# Altium PCB UPCNSL-ABS-PVC-BOT.PcbDoc
Units mm, origin at the board's own origin, x right, y up, seen from the top; angles counter-clockwise.
Board outline 98.4 x 98.4 mm, 2 copper layers (Top Layer, Bottom Layer), stack 0.325 mm thick; 67 components, 65 nets, 176 pads, 58 vias.
Unrouted connection lines stored in the file: 14.
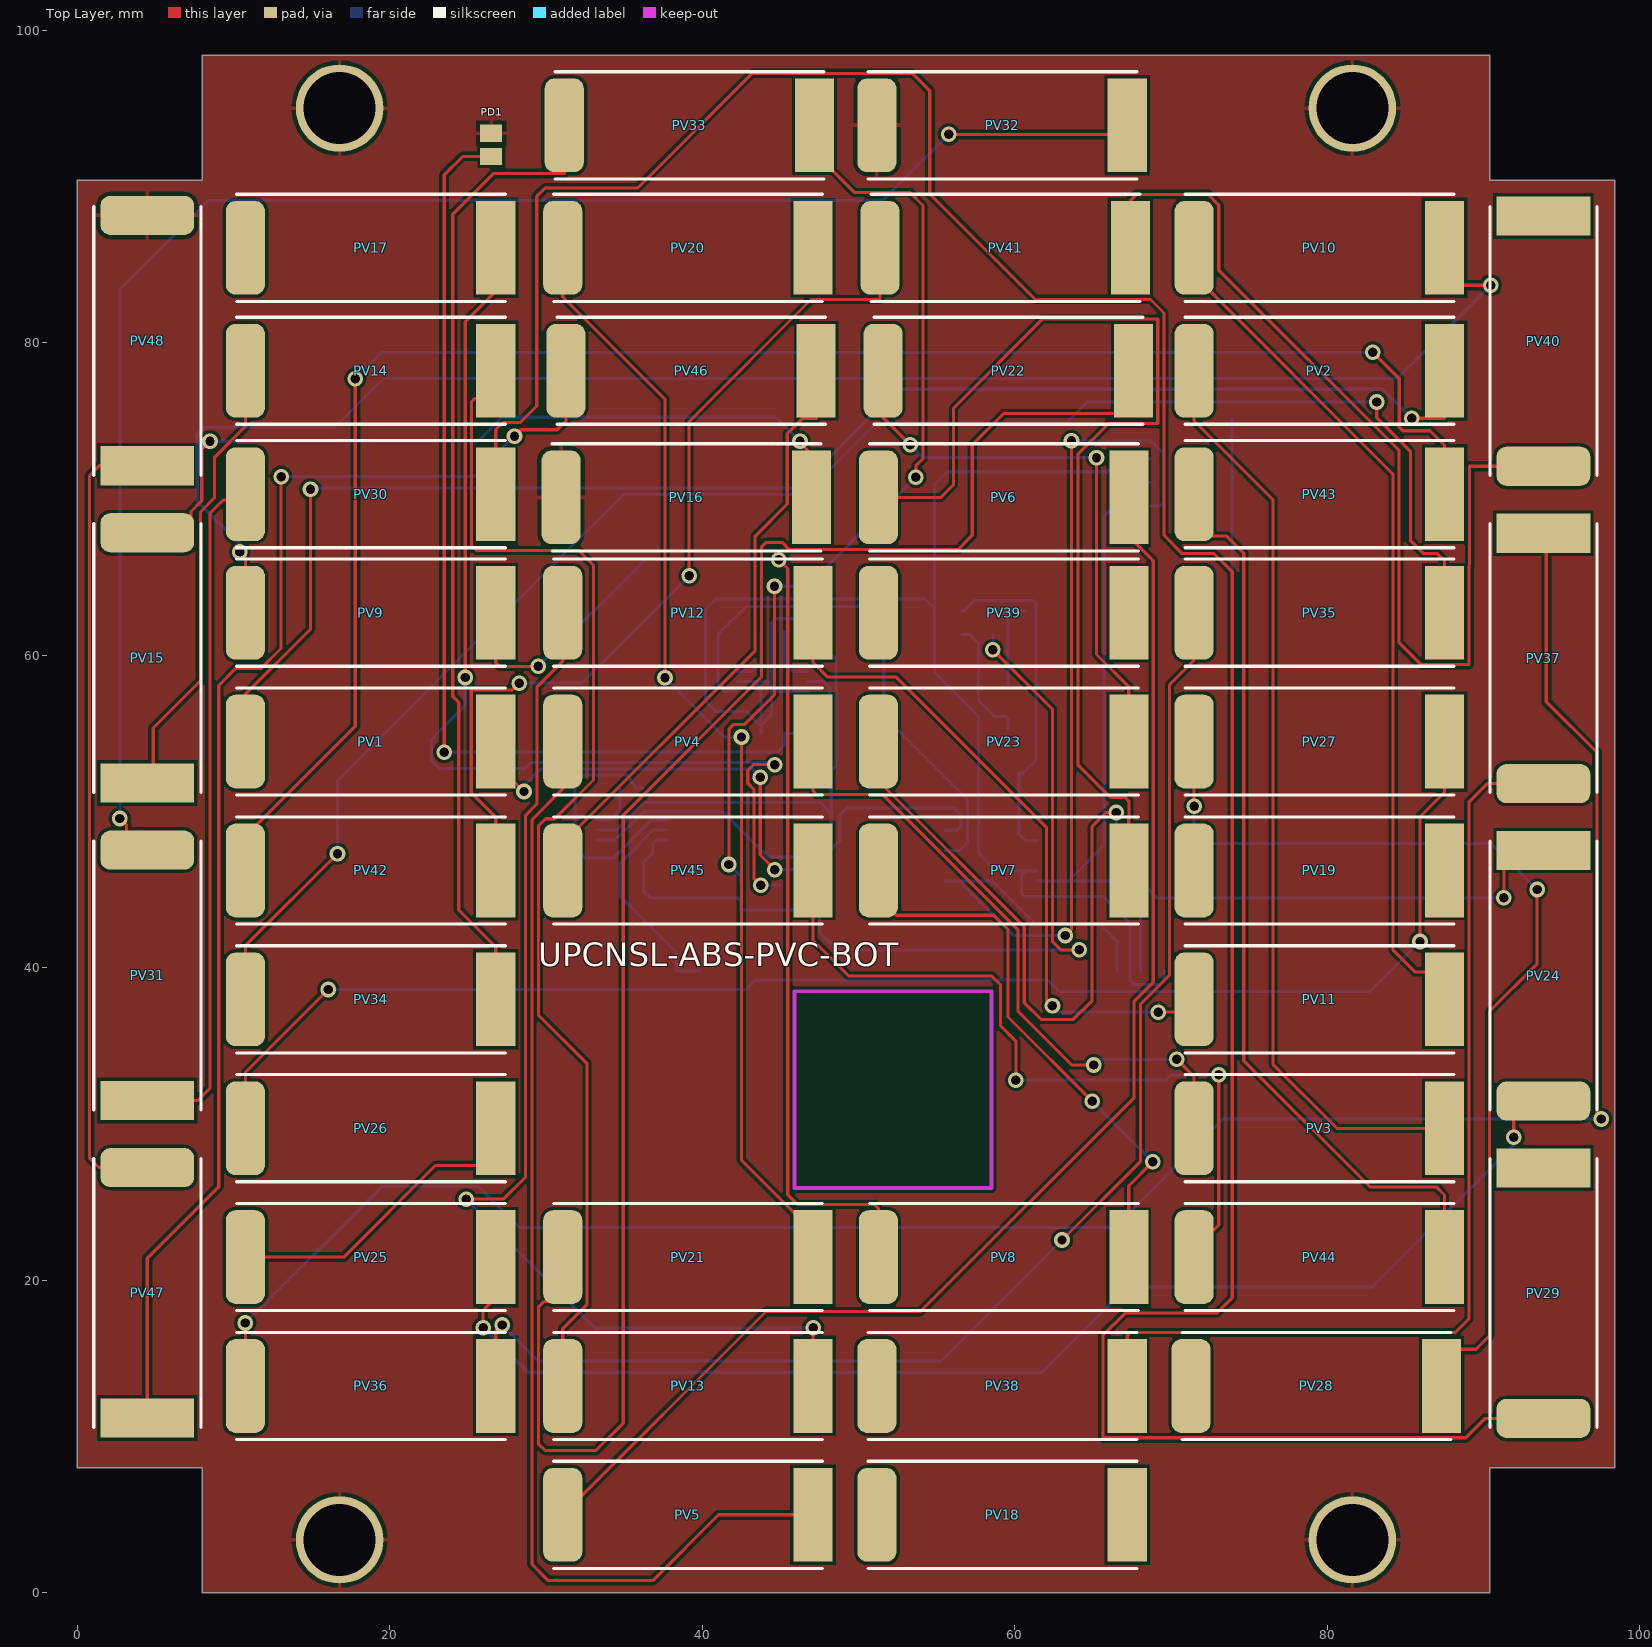
[diagram p0: Top Layer view]
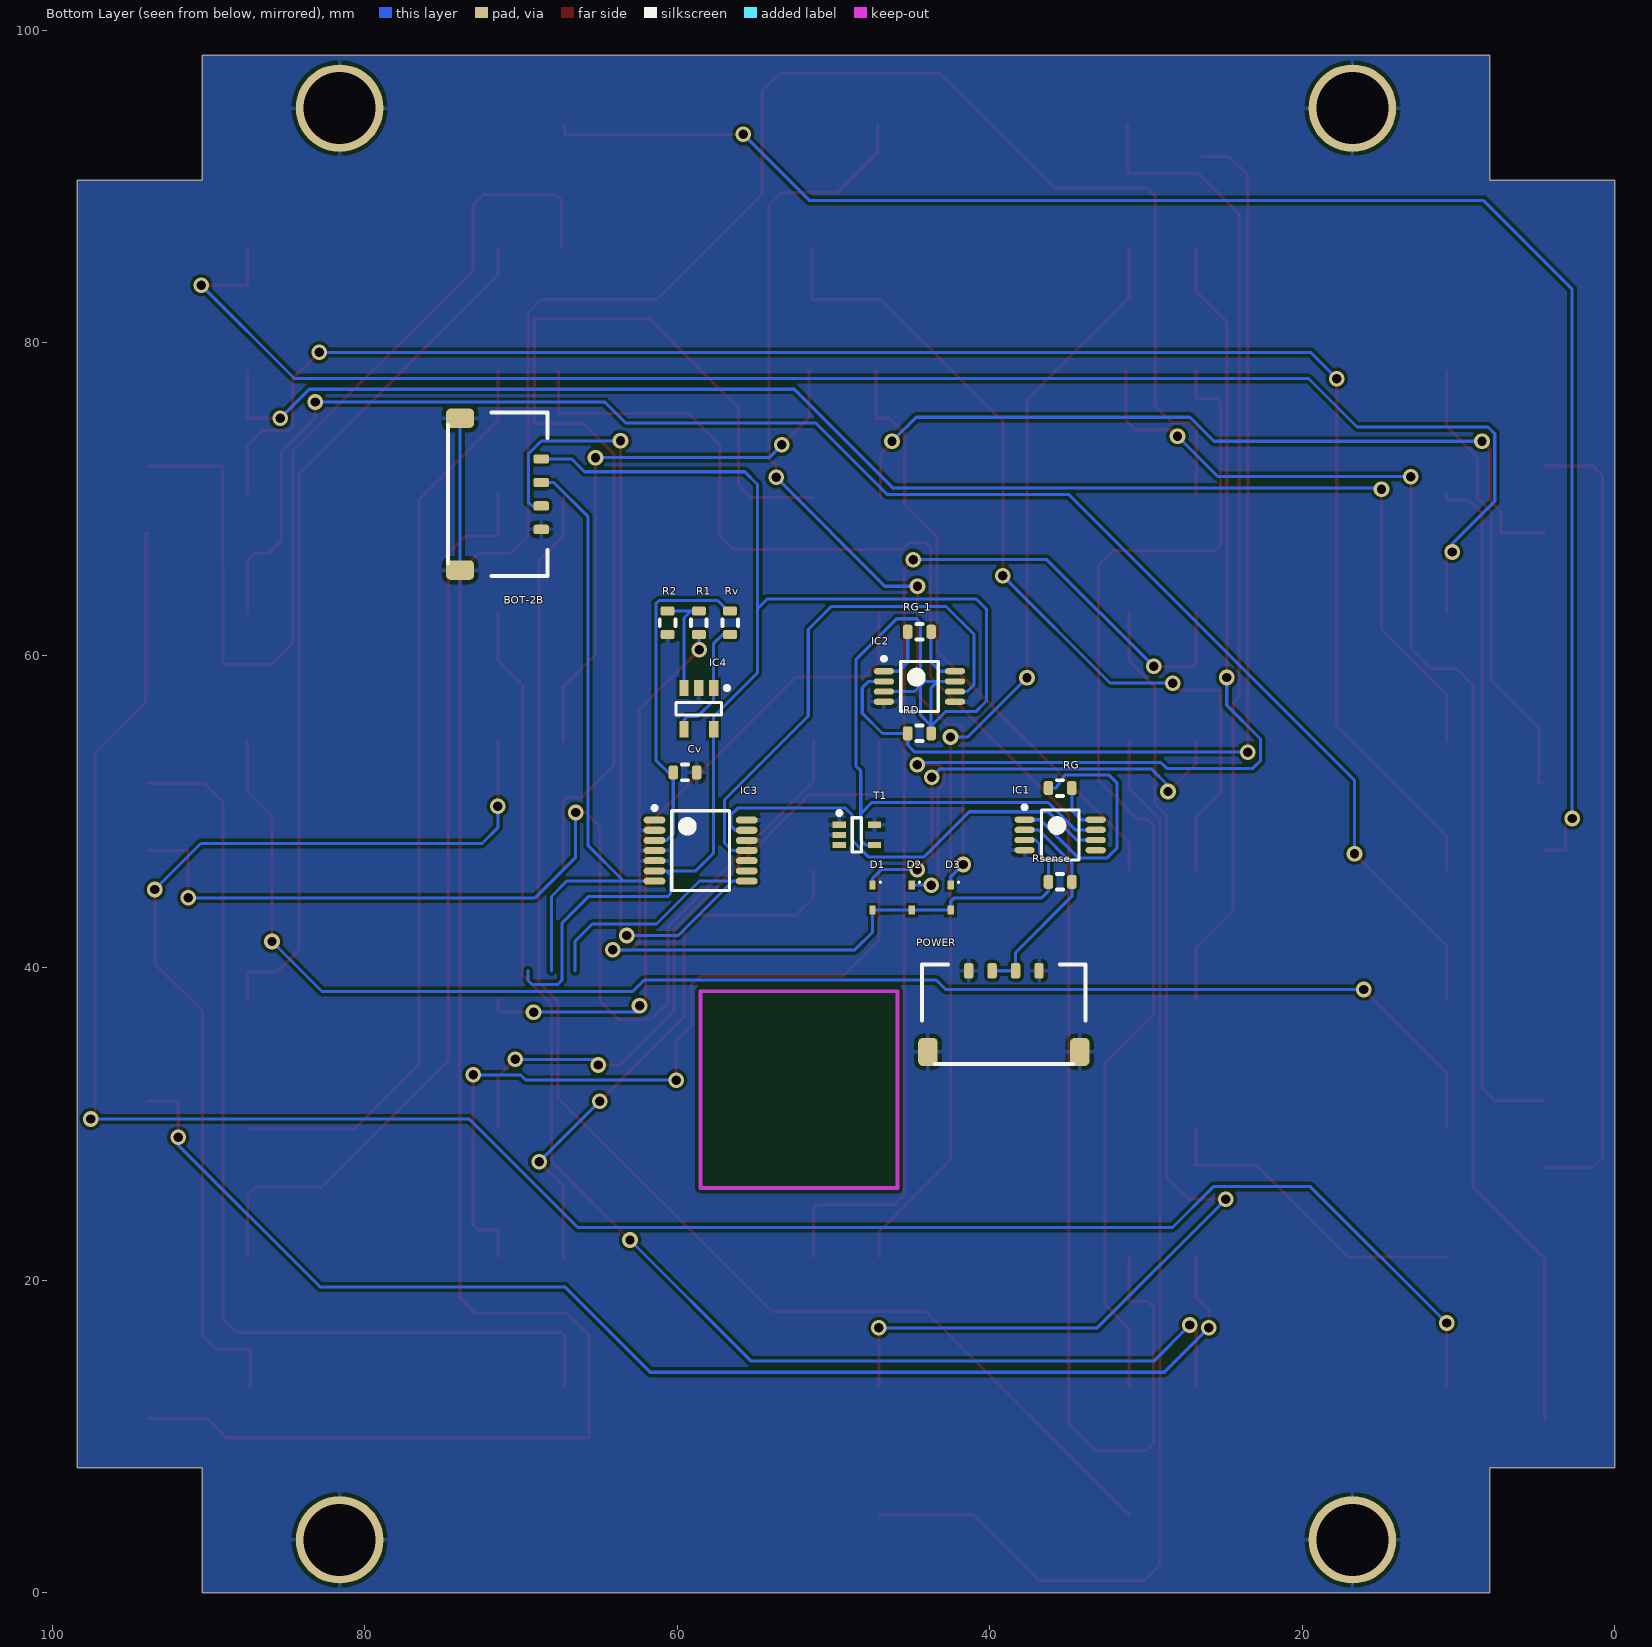
[diagram p1: Bottom Layer view, seen from below]
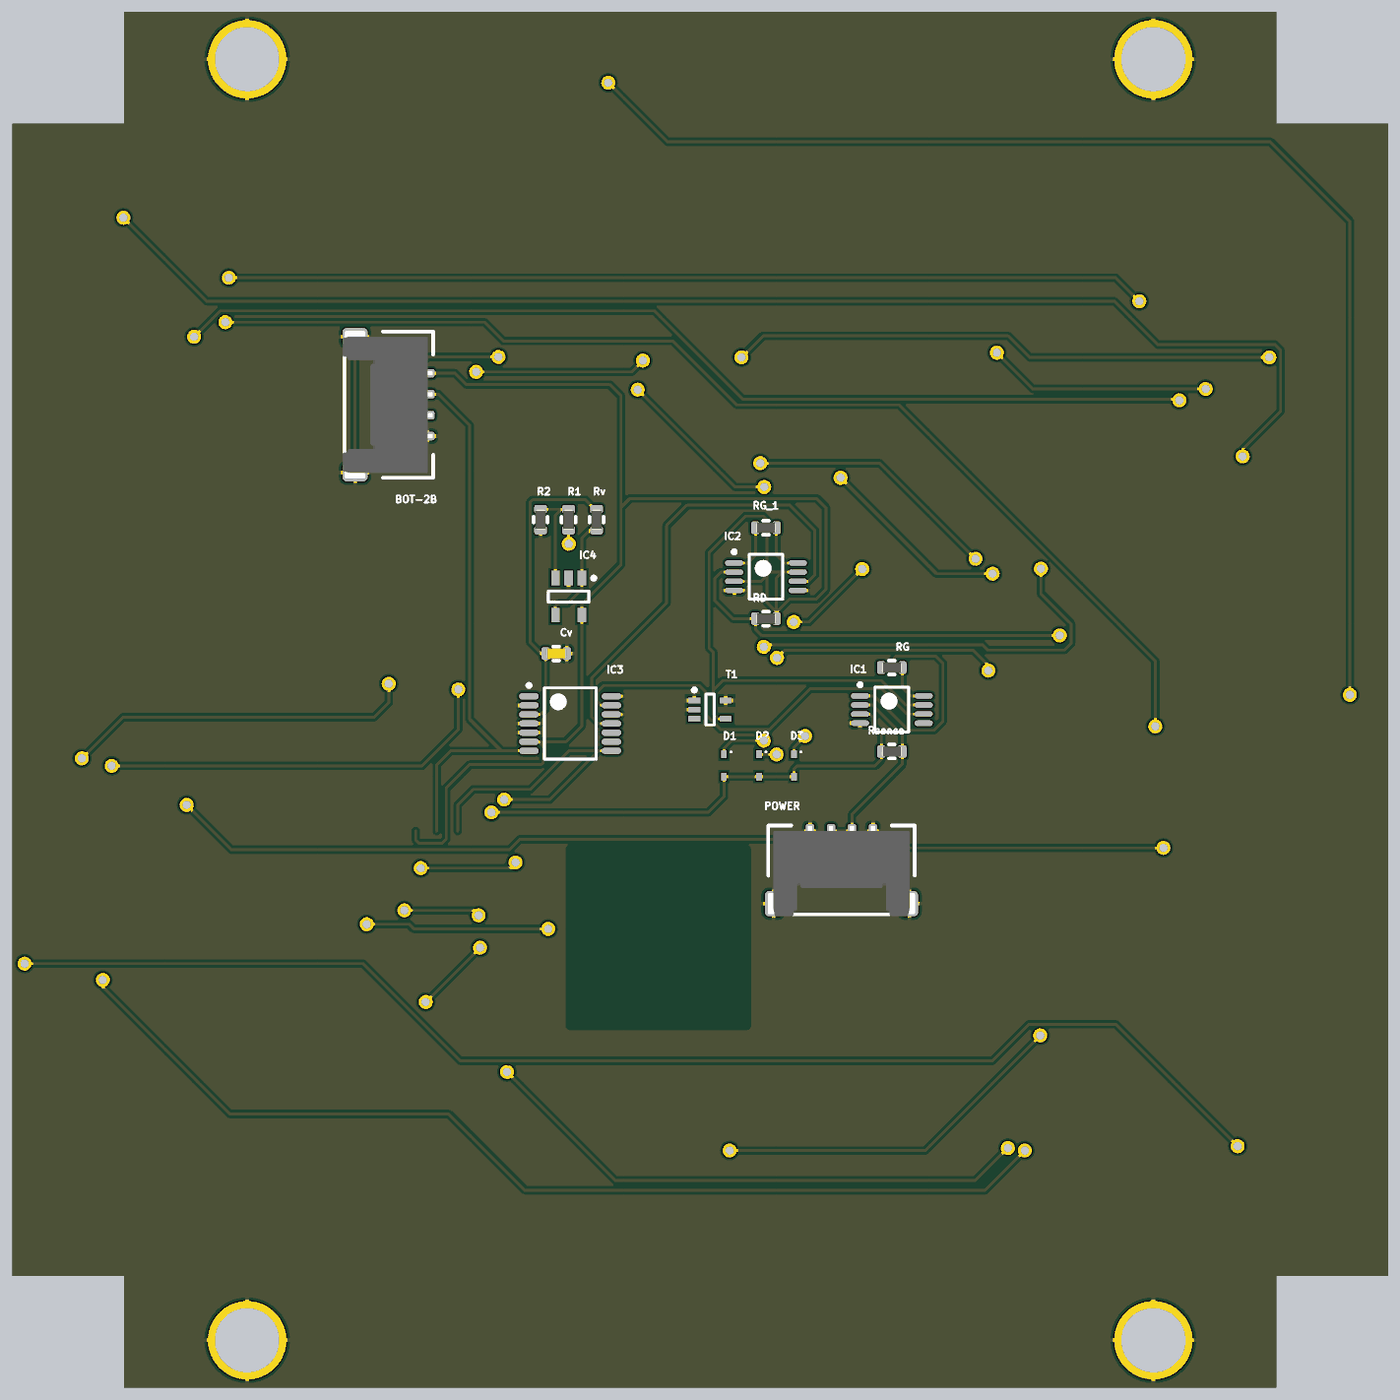
[diagram p2: 3D render of the assembled board from below, using the file's embedded part models]

## Layer stack, top to bottom
Top Solder: solder mask 0.0102, Solder Resist, Dk 3.5
Top Layer: signal copper 0.0356
Dielectric 1: core 0.254, FR-4, Dk 4.2
Bottom Layer: signal copper 0.0356
Bottom Solder: solder mask 0.0102, Solder Resist, Dk 3.5

## Board outline
16,0 82.4,0 90.4,0 90.4,8 98.4,8 98.4,16 98.4,82.4 98.4,90.4 90.4,90.4 90.4,98.4 82.4,98.4 16,98.4 8,98.4 8,90.4 0,90.4 0,82.4 0,16 0,8 8,8 8,0

## Design rules (kind name [scope] priority, off if disabled: settings)
Clearance [All] p1: gap=0.2
PolygonConnect [All] p1: connectstyle=Relief reliefconductorwidth=0.256 reliefentries=4 polygonreliefangle="90 Angle" airgapwidth=0.256
RoutingVias [All] p1: holewidth=0.6 width=1 viastyle="Through Hole" minholewidth=0.711 minwidth=1.27 maxholewidth=0.711 maxwidth=1.27
SolderMaskExpansion [All] p1: expansion=0.102
UnpouredPolygon [All] p1: allowunpoured=FALSE
Width [All] p1: maxlimit=1 minlimit=0.2 preferedwidth=0.2
29 further rules are at their usual default settings.

## Components (designator, comment, footprint, x,y, rotation, side; value= is the part's Value field where it differs from the comment)
BOT-2B "5040500491" 5040500491 73.888,70.3 r270 bottom
Cv "CAP0603" CAP0603 59.5,52.5 r0 bottom
D1 "DIODE" "(Schottky diode) SODFL160X70-2N" 47.5,44.5 r270 bottom
D2 "DIODE" "(Schottky diode) SODFL160X70-2N" 45,44.5 r270 bottom
D3 "DIODE" "(Schottky diode) SODFL160X70-2N" 42.5,44.5 r270 bottom
IC1 "AD623ARMZ" AD623ARMZ 35.5,48.5 r180 bottom
IC2 "AD623ARMZ" AD623ARMZ 44.5,58 r180 bottom
IC3 "MCP3424" MCP3424 58.5,47.5 r180 bottom
IC4 "AD8603" AD8603 58.616,56.577 r270 bottom
PD1 "Photo Sen" C0805 26.493,92.65 r270 top
POWER "5040500491" 5040500491 39.1,34.619 r180 bottom
PV1 "PVCELL" "PV CELLS" 18.8,54.473 r180 top
PV2 "PVCELL" "PV CELLS" 79.5,78.2 r180 top
PV3 "PVCELL" "PV CELLS" 79.5,29.736 r180 top
PV4 "PVCELL" "PV CELLS" 39.1,54.473 r180 top
PV5 "PVCELL" "PV CELLS" 39.1,5 r180 top
PV6 "PVCELL" "PV CELLS" 59.3,70.1 r180 top
PV7 "PVCELL" "PV CELLS" 59.3,46.227 r180 top
PV8 "PVCELL" "PV CELLS" 59.3,21.491 r180 top
PV9 "PVCELL" "PV CELLS" 18.8,62.718 r180 top
PV10 "PVCELL" "PV CELLS" 79.5,86.064 r180 top
PV11 "PVCELL" "PV CELLS" 79.5,37.982 r180 top
PV12 "PVCELL" "PV CELLS" 39.1,62.718 r180 top
PV13 "PVCELL" "PV CELLS" 39.1,13.245 r180 top
PV14 "PVCELL" "PV CELLS" 18.8,78.2 r180 top
PV15 "PVCELL" "PV CELLS" 4.5,59.808 r90 top
PV16 "PVCELL" "PV CELLS" 39,70.1 r180 top
PV17 "PVCELL" "PV CELLS" 18.8,86.064 r180 top
PV18 "PVCELL" "PV CELLS" 59.2,5 r180 top
PV19 "PVCELL" "PV CELLS" 79.5,46.227 r180 top
PV20 "PVCELL" "PV CELLS" 39.1,86.064 r180 top
PV21 "PVCELL" "PV CELLS" 39.1,21.491 r180 top
PV22 "PVCELL" "PV CELLS" 59.6,78.2 r180 top
PV23 "PVCELL" "PV CELLS" 59.3,54.473 r180 top
PV24 "PVCELL" "PV CELLS" 93.818,39.502 r270 top
PV25 "PVCELL" "PV CELLS" 18.8,21.491 r180 top
PV26 "PVCELL" "PV CELLS" 18.8,29.736 r180 top
PV27 "PVCELL" "PV CELLS" 79.5,54.473 r180 top
PV28 "PVCELL" "PV CELLS" 79.3,13.245 r180 top
PV29 "PVCELL" "PV CELLS" 93.818,19.195 r270 top
PV30 "PVCELL" "PV CELLS" 18.8,70.3 r180 top
PV31 "PVCELL" "PV CELLS" 4.5,39.502 r90 top
PV32 "PVCELL" "PV CELLS" 59.2,93.9 r180 top
PV33 "PVCELL" "PV CELLS" 39.2,93.9 r180 top
PV34 "PVCELL" "PV CELLS" 18.8,37.982 r180 top
PV35 "PVCELL" "PV CELLS" 79.5,62.718 r180 top
PV36 "PVCELL" "PV CELLS" 18.8,13.245 r180 top
PV37 "PVCELL" "PV CELLS" 93.818,59.808 r270 top
PV38 "PVCELL" "PV CELLS" 59.2,13.245 r180 top
PV39 "PVCELL" "PV CELLS" 59.3,62.718 r180 top
PV40 "PVCELL" "PV CELLS" 93.818,80.114 r270 top
PV41 "PVCELL" "PV CELLS" 59.4,86.064 r180 top
PV42 "PVCELL" "PV CELLS" 18.8,46.227 r180 top
PV43 "PVCELL" "PV CELLS" 79.5,70.3 r180 top
PV44 "PVCELL" "PV CELLS" 79.5,21.491 r180 top
PV45 "PVCELL" "PV CELLS" 39.1,46.227 r180 top
PV46 "PVCELL" "PV CELLS" 39.3,78.2 r180 top
PV47 "PVCELL" "PV CELLS" 4.5,19.195 r90 top
PV48 "PVCELL" "PV CELLS" 4.5,80.114 r90 top
R1 "RES0603" RES0603 58.616,62.077 r270 bottom
R2 "RES0603" RES0603 60.616,62.077 r90 bottom
RD "RES0603" RES0603 44.5,55 r180 bottom
RG "RES0603" RES0603 35.5,51.5 r180 bottom
RG_1 "RES0603" RES0603 44.5,61.5 r180 bottom
Rsense "RES0603" RES0603 35.5,45.5 r0 bottom
Rv "RES0603" RES0603 56.616,62.077 r90 bottom
T1 "LMT84 DCK" DCK/SOT65P210X110-5N 48.5,48.5 r180 bottom

## Footprints (in the part's own frame and the unit in brackets; to place one, negate y for a bottom-side part, rotate by r counter-clockwise, add the part's x,y. Pads: shape width x height; smd on the part's side, far side on the other; paste and mask are expansions set on the pad)
5040500491 [mm] "1.50mm Pitch Pico-Lock™ Surface Mount Wire-to-Board Header, Right Angle,2.00mm Mated Height, Positive Side Locks, 4 Circuits"
  rrect50% 1.25x1.8 smd: 0(-4.855,0) 0(4.855,0)
  rrect50% 0.6x1 smd: 1(-2.25,5.19) 2(-0.75,5.19) 3(0.75,5.19) 4(2.25,5.19)
  silkscreen extent -5.23,-0.76 5.23,5.59, body extent -5.27,-0.9 5.28,5.54, height 1.98
"(Schottky diode) SODFL160X70-2N" [mm] "SODFL, 2-Leads, Body 0,80x1,60mm, IPC Medium Density"
  rect 0.55x0.4 smd: A(-0.8,0) K(0.8,0)
  silkscreen extent -1.02,0.45 -0.93,0.55, body extent -0.65,-0.45 0.65,0.45, height 0.7
AD623ARMZ [mm] "Single-Supply, Rail-to-Rail, Instrumentation Amplifier"
  oval 1.3x0.4 smd: 1(-2.275,0.975) 2(-2.275,0.325) 3(-2.275,-0.325) 4(-2.275,-0.975) 5(2.275,-0.975) 6(2.275,-0.325) 7(2.275,0.325) 8(2.275,0.975)
  silkscreen extent -2.4,-1.6 1.2,1.9, body extent -1.6,-1.6 1.6,1.6, height 1.1
AD8603 [mm] "SOT23, 5-Leads, Body 2,90x2,80mm, Pitch 0,95mm, IPC Medium Density"
  rect 1.05x0.6 smd: 1(-1.325,0.95) 2(-1.325,0) 3(-1.325,-0.95) 4(1.325,-0.95) 5(1.325,0.95)
  silkscreen extent -1.45,-1.45 0.4,1.92, body extent -0.8,-1.45 0.8,1.45, height 1
C0805 [mm] "Chip Capacitor, Body 2.0x1.3mm, IPC High Density"
  rect 1.1x1.4 smd: 1(-0.75,0) 2(0.75,0)
  body extent -1.1,-0.72 1.1,0.72, height 1.4
CAP0603 [mm] "Capacitor Chip Inductor, Body 0.6x0.3mm, IPC High Density"
  rrect50% 0.6x0.9 smd: 1(-0.75,0) 2(0.75,0)
  silkscreen extent -0.2,-0.5 0.2,0.5, body extent -0.76,-0.38 0.76,0.38, height 0.76
DCK/SOT65P210X110-5N [mm] "SOT23, 5-Leads, Body 2,00x2,10mm, Pitch 0,65mm, IPC Medium Density"
  rect 0.85x0.4 smd: 1(-1.125,0.65) 2(-1.125,0) 3(-1.125,-0.65) 4(1.125,-0.65) 5(1.125,0.65)
  silkscreen extent -1.25,-1.1 0.3,1.52, body extent -0.7,-1.07 0.7,1.08, height 1.1
MCP3424 [mm] "18-Bit, Multi-Channel ?S Analog-to-Digital Converter with  I2C"
  oval 1.4x0.45 smd: 1(-2.95,1.95) 2(-2.95,1.3) 3(-2.95,0.65) 4(-2.95,0) 5(-2.95,-0.65) 6(-2.95,-1.3) 7(-2.95,-1.95) 8(2.95,-1.95) 9(2.95,-1.3) 10(2.95,-0.65) 11(2.95,0) 12(2.95,0.65) 13(2.95,1.3) 14(2.95,1.95)
  silkscreen extent -3.08,-2.55 1.85,2.85, body extent -2.25,-2.55 2.25,2.55, height 1.2
"PV CELLS" [mm] "IXYS KXOB22-12X1L-ND"
  rect 2.5x6 smd: 1(-7.993,0)
  rrect50% 2.5x6 smd: 2(8.025,0)
  silkscreen extent -8.6,-3.43 8.6,3.43, body extent -8.97,-3.5 9.03,3.5, height 1.8
RES0603 [mm] "Resistor Chip Inductor, Body 0.6x0.3mm, IPC High Density"
  rrect50% 0.6x0.9 smd: 1(-0.75,0) 2(0.75,0)
  silkscreen extent -0.2,-0.5 0.2,0.5, body extent -0.76,-0.38 0.76,0.38, height 0.76

## Part data
BOT-2B POWER: library part MOLEX_5040500491, "1.50mm Pitch Pico-Lock™ Surface Mount Wire-to-Board Header, Right Angle,2.00mm Mated Height, Positive Side Locks, 4 Circuits"
Cv: "Capacitor"
IC3: "18-Bit, Multi-Channel ?S Analog-to-Digital Converter with  I2C"
PD1: "Photosensitive Diode"
PV1 PV2 PV3 PV4 PV5 PV6 PV7 PV8 PV9 PV10 PV11 PV12 PV13 PV14 PV15 PV16 PV17 PV18 PV19 PV20 PV21 PV22 PV23 PV24 PV25 PV26 PV27 PV28 PV29 PV30 PV31 PV32 PV33 PV34 PV35 PV36 PV37 PV38 PV39 PV40 PV41 PV42 PV43 PV44 PV45 PV46 PV47 PV48: library part PVCELLS, "IXYS KXOB22-12X1L-ND"
R1 R2 RD RG RG_1 Rsense Rv: "Resistor"

## Free pads (board coordinates)
  round 5.6 hole 4.6: 0(16.8,95) 1(81.6,95) 2(81.6,3.4) 3(16.8,3.4)

## Via types
v1: diameter 1, hole 0.6, Top Layer to Bottom Layer, 58 vias

## Nets (pads, with @x,y where several pads share a name; then routed paths per layer and width w, separated by ;. In a path a pad name is that pad's centre, name@x,y a point inside that pad or via, vN(x,y) a via of type N, cw(c..) or ccw(c..) an arc to the next point about the centre after c; other vN are vias at no path point)
5V: BOT-2B.1 IC1.7 IC2.3 IC2.7 IC3.6 IC4.5 RD.2 T1.4 | length 134
  Bottom Layer w0.2: IC1.7 34.522,48.825 36.268,50.571 47.549,50.571 48.26,49.86 ; IC2.7 43.337,58.325 ; RD.2 43.75,55.474 ; IC2.3 44.821,57.675 44.425,58.071 ; T1.4 47.93,47.85 48.26,48.18 48.26,49.86 ; IC3.6 60.703,46.2 ; BOT-2B.1 66.74,72.55 65.927,71.737 55.677,71.737 54.864,70.924 54.864,62.967 ; 69.543,39.809 69.543,39.186 69.291,38.934 67.648,38.934 67.365,39.218 67.365,42.871 65.665,44.571 60.585,44.571 60.427,44.729 60.427,45.923 60.703,46.2 ; 43.337,58.325 43.75,57.912 43.75,55.474 ; 43.337,58.325 44.171,58.325 44.425,58.071 ; 43.75,55.474 42.836,56.388 40.894,56.388 40.208,57.074 40.208,62.941 40.858,63.591 54.239,63.591 54.864,62.967 ; 43.75,55.474 44.425,56.148 44.425,58.071 ; 44.425,58.071 44.425,62.052 44.704,62.332 45.949,62.332 48.565,59.715 48.565,52.908 48.26,52.603 48.26,49.86 ; 54.864,62.967 54.864,58.877 57.666,56.076 IC4.5 57.666,47.346 58.811,46.2 60.703,46.2
GND: BOT-2B.0 BOT-2B.4 Cv.1 IC1.4 IC1.5 IC2.4 IC2.5 IC3.2 IC3.4 IC3.5 IC3.12 IC3.14 IC4.2 pad.0 pad.1 pad.2 pad.3 PD1.1 POWER.0 POWER.1 POWER.4 PV16.2 PV32.2 PV48.2 R2.1 T1.1 T1.2 T1.5 | length 9.7
  Bottom Layer w0.2: BOT-2B.0@73.888,65.445 BOT-2B.0@73.888,75.155
IRR: IC2.6 IC3.11 | length 34.1
  Bottom Layer w0.2: IC2.6 41.453,57.675 41.004,58.124 41.004,61.324 42.799,63.119 50.14,63.119 51.613,61.646 51.613,56.109 56.972,50.749 56.972,47.983 56.49,47.5 IC3.11
ISENSE: IC1.6 IC3.13 | length 29.6
  Bottom Layer w0.2: IC1.6 34.437,48.175 36.25,49.987 41.326,49.987 44.234,47.079 47.739,47.079 48.819,48.158 48.819,49.784 49.251,50.216 56.134,50.216 56.566,49.784 56.566,49.079 56.286,48.8 IC3.13
NetIC1_1: IC1.1 RG.1 | length 16.4
  Bottom Layer w0.2: RG.1 35.763,51.5 35.204,52.324 32.36,52.324 31.852,51.816 31.852,47.676 32.512,47.015 34.315,47.015 36.775,49.475 IC1.1
NetIC1_8: IC1.8 RG.2 | length 3.2
  Bottom Layer w0.2: IC1.8 34.138,49.475 34.75,50.087 RG.2
NetIC2_1: IC2.1 RG_1.1 | length 3.7
  Bottom Layer w0.2: RG_1.1 45.25,59.538 45.813,58.975 IC2.1
NetIC2_2: IC2.2 PD1.2 RD.1 | length 69.7
  Top Layer w0.2: v1(23.495,53.797) 23.495,90.731 24.663,91.9 PD1.2
  Bottom Layer w0.2: v1(23.495,53.797) 44.793,53.797 45.25,54.254 RD.1@45.25,54.991 ; RD.1 RD.1@45.25,54.991 ; IC2.2 47.745,58.325 48.158,57.912 48.158,56.286 46.863,54.991 RD.1@45.25,54.991
NetIC2_8: IC2.8 RG_1.2 | length 3.7
  Bottom Layer w0.2: IC2.8 43.187,58.975 43.75,59.538 RG_1.2
NetPV1_2: PV1.2 PV2.1 | length 96.9
  Top Layer w0.2: PV1.2 10.775,57.506 14.935,61.666 v1(14.935,70.612) ; v1(85.395,75.159) 87.493,75.159 PV2.1
  Bottom Layer w0.2: v1(14.935,70.612) 15.011,70.688 46.177,70.688 52.502,77.013 83.541,77.013 v1(85.395,75.159)
NetPV2_2: PV2.2 PV3.1 | length 59.2
  Top Layer w0.2: PV2.2 71.475,74.981 76.53,69.926 76.53,33.807 80.62,29.718 87.493,29.718 PV3.1
NetPV3_2: PV3.2 PV4.1 | length 41.7
  Top Layer w0.2: PV4.1 47.093,51.332 47.346,51.079 51.562,51.079 60.198,42.443 60.198,37.236 63.652,33.782 v1(65.049,33.782) ; v1(70.358,34.138) 71.475,33.02 PV3.2
  Bottom Layer w0.2: v1(65.049,33.782) 65.405,34.138 v1(70.358,34.138)
NetPV4_2: PV4.2 PV5.1 | length 73.6
  Top Layer w0.2: PV4.2 31.075,51.446 29.108,49.479 29.108,1.829 30.15,0.787 36.83,0.787 41.046,5.004 47.093,5.004 PV5.1
NetPV5_2: PV5.2 PV6.1 | length 87.2
  Top Layer w0.2: PV5.2 31.075,5.004 44.08,18.009 53.95,18.009 67.634,31.693 67.634,37.856 68.859,39.082 68.859,66.04 67.293,67.606 PV6.1
NetPV6_2: PV6.2 PV7.1 | length 66.6
  Top Layer w0.2: PV6.2 51.275,70.079 55.245,70.079 56.083,70.917 56.083,75.819 61.764,81.5 69.143,81.5 69.143,74.828 66.015,74.828 64.033,72.847 64.033,52.984 66.112,50.905 67.056,50.905 67.297,50.664 67.297,49.725 67.293,49.721 PV7.1
NetPV7_2: PV7.2 PV8.1 | length 36.3
  Top Layer w0.2: PV7.2 51.275,44.501 52.418,43.358 58.657,43.358 59.563,42.452 59.563,36.855 v1(64.948,31.471) ; PV8.1 67.293,26.044 v1(68.834,27.584)
  Bottom Layer w0.2: v1(64.948,31.471) v1(68.834,27.584)
NetPV9_2: PV9.2 PV10.1 | length 104.8
  Top Layer w0.2: v1(10.414,66.599) 10.775,66.238 PV9.2 ; PV10.1 87.493,83.668 v1(90.449,83.668)
  Bottom Layer w0.2: v1(10.414,66.599) 10.414,67.132 7.696,69.85 7.696,74.168 8.128,74.6 16.508,74.6 19.607,77.699 84.48,77.699 v1(90.449,83.668)
NetPV10_2: PV10.2 PV11.1 | length 55.8
  Top Layer w0.2: PV10.2 71.475,84.303 84.188,71.589 84.188,41.161 85.623,39.726 87.493,39.726 PV11.1
NetPV11_2: PV11.2 PV12.1 | length 44.2
  Top Layer w0.2: PV12.1 47.093,59.538 48.033,58.598 52.426,58.598 62.021,49.003 62.021,37.954 v1(62.408,37.567) ; v1(69.19,37.16) 71.475,37.16 PV11.2
  Bottom Layer w0.2: v1(62.408,37.567) 62.408,37.389 62.636,37.16 v1(69.19,37.16)
NetPV12_2: PV12.2 PV13.1 | length 70.8
  Top Layer w0.2: v1(24.892,25.197) 27.28,25.197 28.702,26.619 28.702,49.765 29.419,50.483 29.419,57.958 31.075,59.614 PV12.2 ; PV13.1 v1(47.093,16.966)
  Bottom Layer w0.2: v1(24.892,25.197) 33.123,16.966 v1(47.093,16.966)
NetPV13_2: PV13.2 PV14.1 | length 77.2
  Top Layer w0.2: PV14.1 26.793,76.429 25.451,76.429 25.243,76.221 25.243,67.035 25.578,66.7 32.106,66.7 33.045,65.761 33.045,52.019 30.562,49.536 29.978,49.536 29.515,49.073 29.515,36.982 32.639,33.858 32.639,18.48 31.075,16.916 PV13.2
NetPV14_2: PV14.2 PV15.1 | length 29.2
  Top Layer w0.2: PV15.1 4.877,51.815 4.877,55.347 7.899,58.369 7.899,69.164 8.788,70.053 8.788,72.644 10.775,74.631 PV14.2
NetPV15_2: PV15.2 PV16.1 | length 52.1
  Top Layer w0.2: PV15.2 7.29,67.832 7.29,69.19 7.982,69.882 7.982,73.158 v1(8.509,73.685) ; v1(46.253,73.685) 46.253,73.587 46.993,72.847 PV16.1
  Bottom Layer w0.2: v1(8.509,73.685) 25.654,73.685 27.191,75.222 44.717,75.222 v1(46.253,73.685)
NetPV17_2: PV17.2 PV18.1
NetPV18_2: PV18.2 PV19.1
NetPV19_2: PV19.2 PV20.1
NetPV20_2: PV20.2 PV21.1 | length 71.9
  Top Layer w0.2: PV20.2 31.075,82.92 37.617,76.378 v1(37.617,58.547) ; v1(42.513,54.762) 42.513,27.692 47.093,23.112 PV21.1
  Bottom Layer w0.2: v1(37.617,58.547) 41.402,54.762 v1(42.513,54.762)
NetPV21_2: PV21.2 PV22.1 | length 113.2
  Top Layer w0.2: PV21.2 31.075,18.644 29.87,18.644 29.515,18.288 29.515,9.55 29.947,9.119 33.198,9.119 34.95,10.871 34.95,49.766 43.788,58.604 43.788,66.914 44.094,67.221 45.11,67.221 45.58,66.751 56.363,66.751 57.277,67.666 57.277,73.457 59.284,75.463 67.593,75.463 PV22.1
NetPV22_2: PV22.2 PV23.1 | length 36.7
  Top Layer w0.2: PV22.2 51.575,75.184 v1(53.302,73.457) ; v1(65.227,72.644) 65.227,60.046 67.293,57.98 PV23.1
  Bottom Layer w0.2: v1(53.302,73.457) 54.115,72.644 v1(65.227,72.644)
NetPV23_2: PV23.2 PV24.1 | length 73.2
  Top Layer w0.2: PV23.2 51.275,51.95 60.602,42.624 60.602,37.773 61.678,36.697 63.748,36.697 64.948,37.897 64.948,49.047 65.837,49.936 v1(66.497,49.936) ; v1(91.288,44.475) 91.288,47.494 PV24.1
  Bottom Layer w0.2: v1(66.497,49.936) 66.497,47.066 69.088,44.475 v1(91.288,44.475)
NetPV25_2: PV25.2 PV26.1 | length 20.8
  Top Layer w0.2: PV25.2 17.069,21.491 22.93,27.352 26.793,27.352 PV26.1
NetPV26_2: PV26.2 PV27.1 | length 96.2
  Top Layer w0.2: PV26.2 10.775,33.305 v1(16.078,38.608) ; v1(85.928,41.681) 85.928,49.657 87.493,51.222 PV27.1
  Bottom Layer w0.2: v1(16.078,38.608) 42.824,38.608 43.434,39.218 62.103,39.218 62.84,38.481 82.728,38.481 v1(85.928,41.681)
NetPV27_2: PV27.2 PV28.1 | length 64.7
  Top Layer w0.2: v1(71.476,50.343) PV27.2 ; PV28.1 87.293,15.596 89.51,15.596 90.373,16.459 90.373,37.211 93.421,40.259 v1(93.421,45.009)
  Bottom Layer w0.2: v1(71.476,50.343) 71.476,48.971 72.492,47.955 90.475,47.955 v1(93.421,45.009)
NetPV28_2: PV28.2 PV29.1
NetPV29_2: PV29.2 PV30.1 | length 184.9
  Top Layer w0.2: PV30.1 26.793,74.443 27.229,74.879 28.346,74.879 29.413,75.946 29.413,89.357 29.947,89.891 35.865,89.891 43.18,97.206 53.467,97.206 54.559,96.114 54.559,89.51 61.316,82.753 68.682,82.753 69.545,81.89 69.545,67.666 70.714,66.497 72.746,66.497 73.914,65.329 73.914,18.898 72.923,17.907 67.056,17.907 65.634,16.485 65.634,9.931 88.849,9.931 90.088,11.171 PV29.2
NetPV30_2: PV30.2 PV31.1 | length 44.1
  Top Layer w0.2: PV31.1 7.722,31.508 8.509,32.296 8.509,69.088 9.347,69.926 10.775,69.926 PV30.2
NetPV31_2: PV31.2 PV32.1 | length 106.5
  Top Layer w0.2: v1(2.743,49.553) 3.175,49.122 3.175,47.526 PV31.2 ; v1(55.778,93.32) 67.193,93.32 PV32.1
  Bottom Layer w0.2: v1(2.743,49.553) 2.743,83.414 8.433,89.103 51.562,89.103 v1(55.778,93.32)
NetPV33_2: PV33.2 PV34.1 | length 62.7
  Top Layer w0.2: PV34.1 26.793,41.33 24.422,43.701 24.422,56.985 24.041,57.366 24.041,88.202 26.67,90.83 31.175,90.83 PV33.2
NetPV34_2: PV34.2 PV35.1 | length 108.8
  Top Layer w0.2: PV34.2 10.775,41.407 v1(16.662,47.295) ; v1(83.16,76.2) 83.16,75.203 85.306,73.057 85.306,67.348 86.157,66.497 87.036,66.497 87.493,66.04 PV35.1
  Bottom Layer w0.2: v1(16.662,47.295) 16.662,51.994 34.951,70.282 46.558,70.282 51.13,74.854 63.292,74.854 64.638,76.2 v1(83.16,76.2)
NetPV35_2: PV35.2 PV36.1 | length 87.7
  Top Layer w0.2: PV36.1 26.793,16.739 v1(27.199,17.145) ; v1(63.017,22.581) 68.034,27.597 68.034,37.656 69.901,39.522 69.901,58.115 71.475,59.69 PV35.2
  Bottom Layer w0.2: v1(27.199,17.145) 29.511,14.834 55.27,14.834 v1(63.017,22.581)
NetPV36_2: PV36.2 PV37.1 | length 137.5
  Top Layer w0.2: v1(10.77,17.277) 10.775,17.272 PV36.2 ; PV37.1 94.005,67.801 94.005,57.023 97.257,53.772 97.257,30.582 v1(97.511,30.328)
  Bottom Layer w0.2: v1(10.77,17.277) 19.489,25.997 25.692,25.997 28.308,23.381 66.357,23.381 73.304,30.328 v1(97.511,30.328)
NetPV37_2: PV37.2 PV38.1 | length 63.8
  Top Layer w0.2: PV38.1 67.193,16.459 67.396,16.662 88.189,16.662 89.052,17.526 89.052,50.597 90.238,51.783 PV37.2
NetPV38_2: PV38.2 PV39.1
NetPV39_2: PV39.2 PV40.1
NetPV41_2: PV41.2 PV42.1 | length 57.8
  Top Layer w0.2: PV42.1 26.793,49.632 25.222,51.202 25.222,57.773 27.851,57.773 v1(28.296,58.217) ; v1(39.167,65.075) 39.167,74.955 46.965,82.753 51.375,82.753 PV41.2
  Bottom Layer w0.2: v1(28.296,58.217) 32.309,58.217 v1(39.167,65.075)
NetPV42_2: PV42.2 PV43.1 | length 112.2
  Top Layer w0.2: PV42.2 10.775,48.412 17.805,55.443 v1(17.805,77.699) ; v1(82.906,79.375) 84.595,77.686 84.595,74.574 84.811,74.359 86.563,74.359 87.493,73.429 PV43.1
  Bottom Layer w0.2: v1(17.805,77.699) 19.482,79.375 v1(82.906,79.375)
NetPV43_2: PV43.2 PV44.1 | length 59.1
  Top Layer w0.2: PV43.2 71.475,67.615 73.558,67.615 74.651,66.523 74.651,34.061 82.728,25.984 86.97,25.984 87.493,25.461 PV44.1
NetPV44_2: PV44.2 PV45.1 | length 50.3
  Top Layer w0.2: PV45.1 47.093,41.758 49.379,39.472 58.522,39.472 59.08,38.913 59.08,36.297 60.071,35.306 v1(60.071,32.817) ; PV44.2 71.475,23.241 72.746,23.241 73.05,23.546 v1(73.05,33.147)
  Bottom Layer w0.2: v1(60.071,32.817) 69.698,32.817 70.028,33.147 v1(73.05,33.147)
NetPV45_2: PV45.2 PV46.1 | length 39.2
  Top Layer w0.2: PV45.2 31.075,47.981 43.388,60.293 43.388,67.621 45.441,69.674 45.441,74.168 46.431,75.159 47.293,75.159 PV46.1
NetPV46_2: PV46.2 PV47.1 | length 87.6
  Top Layer w0.2: PV47.1 4.496,11.202 4.496,21.412 9.068,25.984 9.068,58.064 10.16,59.157 11.786,59.157 13.056,60.427 v1(13.056,71.425) ; v1(27.991,74.016) 28.397,74.422 30.716,74.422 31.275,74.981 PV46.2
  Bottom Layer w0.2: v1(13.056,71.425) 25.4,71.425 v1(27.991,74.016)
NetPV47_2: PV47.2 PV48.1 | length 51.6
  Top Layer w0.2: PV47.2 1.405,27.22 0.8,27.826 0.8,71.498 1.422,72.121 PV48.1
PV9: PV8.2 PV9.1 | length 74.4
  Top Layer w0.2: PV9.1 26.793,59.516 27.026,59.284 v1(29.515,59.284) ; v1(44.907,66.116) 45.473,65.55 45.473,25.476 46.083,24.867 51.003,24.867 51.275,24.595 PV8.2
  Bottom Layer w0.2: v1(29.515,59.284) 36.347,66.116 v1(44.907,66.116)
PV25: PV24.2 PV25.1 | length 82.7
  Top Layer w0.2: v1(25.984,16.967) 25.984,18.089 26.793,18.898 PV25.1 ; v1(91.923,29.159) 91.923,31.477 PV24.2
  Bottom Layer w0.2: v1(25.984,16.967) 28.829,14.122 61.722,14.122 67.183,19.583 82.855,19.583 91.923,28.651 v1(91.923,29.159)
PV41: PV40.2 PV41.1 | length 64.3
  Top Layer w0.2: PV41.1 67.393,89.078 67.799,89.484 72.365,89.484 73.05,88.798 73.05,84.633 84.588,73.095 84.588,60.801 85.979,59.411 89.052,59.411 89.103,72.089 PV40.2
SCL: BOT-2B.3 IC3.8 | length 64.7
  Top Layer w0.2: v1(63.221,42.062) 63.627,42.469 v1(63.627,73.711)
  Bottom Layer w0.2: IC3.8 56.456,45.55 ; v1(63.221,42.062) 59.944,42.062 56.456,45.55 ; v1(63.627,73.711) 68.682,73.711 69.52,72.873 69.52,69.779 69.291,69.55 BOT-2B.3 ; 66.543,39.809 66.543,41.686 65.43,42.799 61.323,42.799 58.572,45.55 56.456,45.55
SDA: BOT-2B.2 IC3.7 | length 39.9
  Bottom Layer w0.2: IC3.7 63.432,45.55 ; 68.043,39.809 68.043,44.563 67.056,45.55 63.432,45.55 ; BOT-2B.2 67.894,71.05 65.697,68.853 65.697,47.816 63.432,45.55
TEMP: IC3.1
VCC: D1.K D2.K D3.K IC1.3 R1.2 Rsense.2 | length 58.1
  Top Layer w0.2: v1(58.598,60.35) 62.421,56.528 62.421,41.669 62.941,41.148 v1(64.135,41.148)
  Bottom Layer w0.2: IC1.3 37.079,48.175 36.824,47.92 36.824,47.325 36.25,46.751 Rsense.2 36.25,44.907 36.682,44.475 42.266,44.475 42.5,44.241 D3.K 43.739,43.7 D2.K 46.228,43.7 D1.K 47.5,42.289 48.641,41.148 v1(64.135,41.148) ; v1(58.598,60.35) 58.598,61.327 R1.2
VCC_1: D1.A PV1.1 | length 29.9
  Top Layer w0.2: PV1.1 26.793,53.09 v1(28.6,51.283) ; v1(43.713,52.197) 43.713,47.219 v1(44.653,46.279)
  Bottom Layer w0.2: v1(28.6,51.283) 28.6,51.664 29.667,52.73 43.18,52.73 v1(43.713,52.197) ; v1(44.653,46.279) 46.941,46.279 47.5,45.72 D1.A
VCC_2: D2.A PV17.1 | length 67.8
  Top Layer w0.2: v1(24.841,58.572) 24.841,81.331 26.793,83.283 PV17.1 ; v1(43.739,45.288) 43.307,45.72 43.307,51.41 42.913,51.803 42.913,52.629 43.294,53.01 44.628,53.01 v1(44.653,52.984)
  Bottom Layer w0.2: v1(24.841,58.572) 24.841,56.794 22.682,54.635 22.682,53.238 23.165,52.756 28.677,52.756 29.058,53.137 44.501,53.137 v1(44.653,52.984) ; v1(43.739,45.288) 45,45.288 D2.A
VCC_3: D3.A PV33.1 | length 60.7
  Top Layer w0.2: v1(41.707,46.609) 41.707,55.27 42.012,55.575 42.723,55.575 44.628,57.48 v1(44.628,64.414) ; PV33.1 47.193,92.151 49.733,89.611 53.289,89.611 54.127,88.773 54.127,72.568 53.67,72.111 v1(53.67,71.374)
  Bottom Layer w0.2: v1(41.707,46.609) 42.5,45.816 D3.A ; v1(44.628,64.414) 46.711,64.414 v1(53.67,71.374)
VD: IC4.1 IC4.4 Rv.1 | length 8
  Bottom Layer w0.2: Rv.1 57.095,61.327 57.666,60.757 IC4.1 57.666,57.099 58.682,56.083 59.362,56.083 59.566,55.88 IC4.4
VDD: IC1.2 POWER.2 POWER.3 Rsense.1 | length 13.8
  Bottom Layer w0.2: IC1.2 36.888,48.825 34.75,46.687 Rsense.1 34.75,44.574 38.35,40.974 POWER.3 POWER.2
VDIV: IC4.3 R1.1 R2.2 | length 7.1
  Bottom Layer w0.2: R1.1 59.121,62.827 ; IC4.3 59.566,62.382 59.121,62.827 ; R2.2 59.121,62.827
VOLT: Cv.2 IC3.3 Rv.2 | length 21.9
  Bottom Layer w0.2: Rv.2 56.744,62.827 57.417,63.5 61.163,63.5 61.366,63.297 61.366,53.289 60.554,52.476 Cv.2@60.25,52.476 ; Cv.2 Cv.2@60.25,52.476 ; IC3.3 60.665,48.15 60.25,48.565 Cv.2@60.25,52.476
pads on no net: IC3.9 IC3.10 T1.3

## Polygon pours and split planes (outlines as drawn)
GND on Bottom Layer "Bot" (solid, pour order 6): 8,98.4 90.4,98.4 90.4,90.4 98.4,90.4 98.4,8 90.4,8 90.4,0 8,0 8,8 0,8 0,90.4 8,90.4 8,98.4
GND on Top Layer "Top" (solid, pour order 5): 8,98.4 90.4,98.4 90.4,90.4 98.4,90.4 98.4,8 90.4,8 90.4,0 8,0 8,8 0,8 0,90.4 8,90.4 8,98.4

## Keep-outs
Keep-Out Layer:
  lines w0.254: 45.9,25.9 45.9,38.5 58.5,38.5 58.5,25.9 45.9,25.9

## Other copper
Top Layer:
  pour cut-out: 46.2,38.2 46.2,26.2 58.2,26.2 58.2,38.2
Bottom Layer:
  pour cut-out: 46.2,38.2 46.2,26.2 58.2,26.2 58.2,38.2

## Silkscreen, mask and mechanical layers (free items; w line width, h text height)
Top Overlay:
  text "UPCNSL-ABS-PVC-BOT" at 29.525,40.083 h1.52
Mechanical 3:
  lines w0.254: 46.2,26.2 46.2,38.2 58.2,38.2 58.2,26.2 46.2,26.2
  lines w2: -1,8 ccw(c0,8) 0,7 ; -1,8 ccw(c0,8) 0,7 ; -1,8 -1,16 -1,82.4 -1,90.4 ; -1,90.4 cw(c0,90.4) 0,91.4 ; -1,90.4 cw(c0,90.4) 0,91.4 ; 0,7 7,7 7,0 ; 0,91.4 7,91.4 7,98.4 ; 7,0 ccw(c8,0) 8,-1 ; 7,0 ccw(c8,0) 8,-1 ; 7,98.4 cw(c8,98.4) 8,99.4 ; 7,98.4 cw(c8,98.4) 8,99.4 ; 8,-1 16,-1 82.4,-1 90.4,-1 ; 8,99.4 16,99.4 82.4,99.4 90.4,99.4 ; 90.4,-1 ccw(c90.4,0) 91.4,0 ; 90.4,-1 ccw(c90.4,0) 91.4,0 ; 90.4,99.4 cw(c90.4,98.4) 91.4,98.4 ; 90.4,99.4 cw(c90.4,98.4) 91.4,98.4 ; 91.4,0 91.4,7 98.4,7 ; 91.4,98.4 91.4,91.4 98.4,91.4 ; 98.4,7 ccw(c98.4,8) 99.4,8 ; 98.4,7 ccw(c98.4,8) 99.4,8 ; 98.4,91.4 cw(c98.4,90.4) 99.4,90.4 ; 98.4,91.4 cw(c98.4,90.4) 99.4,90.4 ; 99.4,8 99.4,16 99.4,82.4 99.4,90.4